# Altium PCB Smart_Plug_PCB.PcbDoc
Units mm, origin at the board's own origin, x right, y up, seen from the top; angles counter-clockwise.
Board outline 228.98 x 84.2 mm, 2 copper layers (Top Layer, Bottom Layer); 70 components, 44 nets, 223 pads, 9 vias.
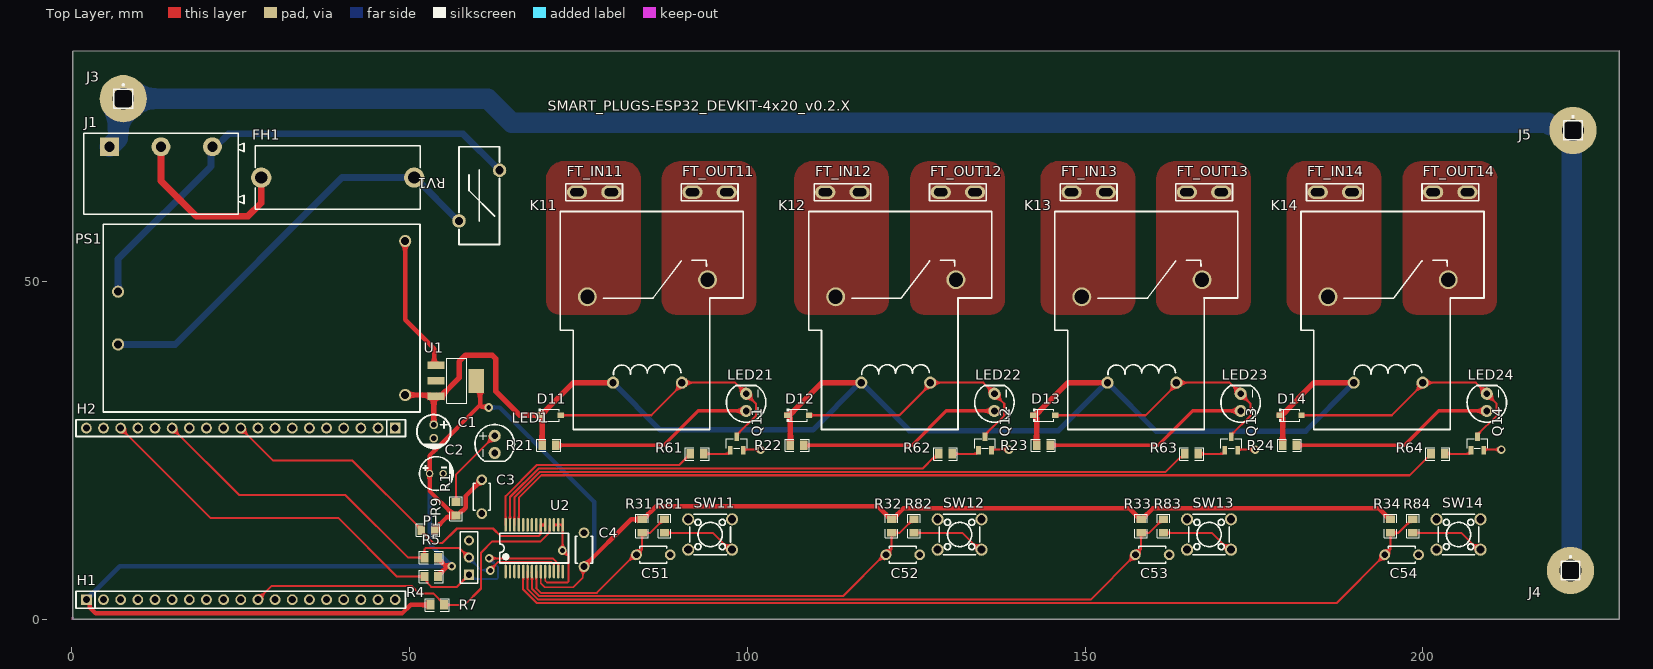
[diagram p0: Top Layer view]
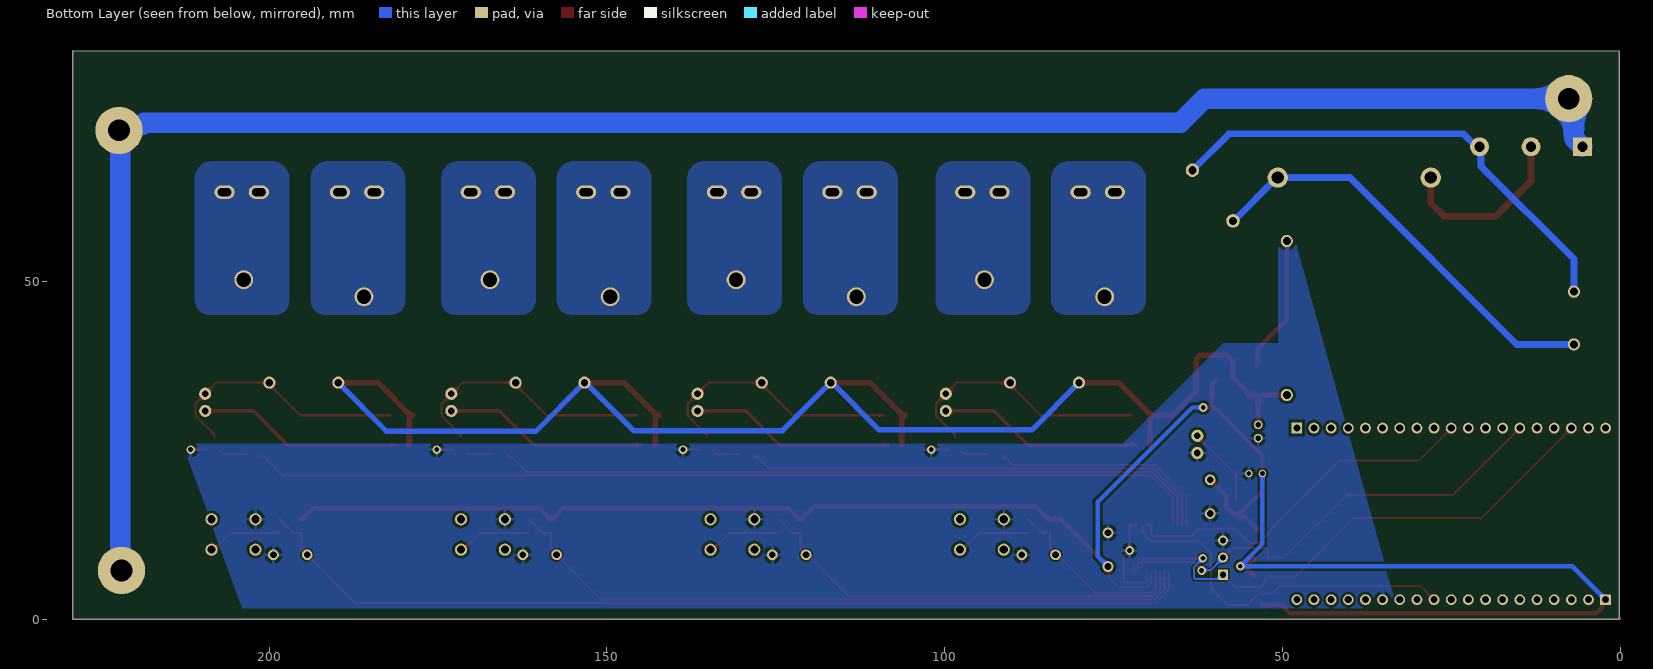
[diagram p1: Bottom Layer view, seen from below]

## Layer stack, top to bottom
Top Solder: solder mask 0.0102, Solder Resist, Dk 3.5
Top Layer: signal copper 0.0356
Dielectric 1: dielectric 0.32, FR-4, Dk 4.8
Bottom Layer: signal copper 0.0356
Bottom Solder: solder mask 0.0102, Solder Resist, Dk 3.5

## Board outline
0.127,0 0.127,84.074 229.108,84.201 229.108,0.127 229.108,0
cut-out: 0,0 0.254,0 0.254,0.254 0,0.254
cut-out: 0,0 0.254,0 0.254,0.254 0,0.254
cut-out: 0,0 0.254,0 0.254,0.254 0,0.254

## Design rules (kind name [scope] priority, off if disabled: settings)
BoardOutlineClearance BoardOutlineClearance_HV [InNetClass('HV_NETS')] p1: gap=3 ignorepadtopadclearanceinfootprint=FALSE
BoardOutlineClearance BoardOutlineClearance_HV_PE [InNetClass('PE_NETS')] p2: gap=0.5 ignorepadtopadclearanceinfootprint=FALSE
Clearance Clearance_HV_Internal [InNetClass('HV_Nets') Or InNetClass('HV_NETS_0.3A') Or InNetClass('PE_NETS') vs InNetClass('HV_Nets') Or InNetClass('HV_NETS_0.3A') Or InNetClass('PE_NETS')] p1: gap=3 ignorepadtopadclearanceinfootprint=FALSE
Clearance Clearance_HV_Isolation [InNetClass('HV_Nets') Or InNetClass('HV_NETS_0.3A') Or InNetClass('PE_NETS') vs InNetClass('LV_Nets')] p2: gap=6 ignorepadtopadclearanceinfootprint=FALSE
Clearance Clearance_SSOP [InComponent('U2')] p3: gap=0.18 ignorepadtopadclearanceinfootprint=FALSE
Clearance Clearance_Exception [InNet('NetU2_*') Or InNet('NetJ2_*') Or InNet('IN_SIG*') Or InNet('DRV_SIG*') Or InNet('NetH*')] p4: gap=0.2 ignorepadtopadclearanceinfootprint=FALSE
Clearance [All] p5: gap=0.4 ignorepadtopadclearanceinfootprint=FALSE
HoleSize [All] p1: absolutevalues=TRUE maxlimit=6 minlimit=0.025 maxpercent=80.000 minpercent=20.000
MinimumSolderMaskSliver Silver_Transistors [HasFootprint('TO-92-3_L4.9-W3.7-P1.27-L') Or InComponent('U2')] p1: minsoldermaskwidth=0.08
MinimumSolderMaskSliver MinimumSolderMaskSliver_1 [All] p2: minsoldermaskwidth=0.254
PolygonConnect Connect_HV_Solid [InNetClass('HV_NETS')] p1: connectstyle=Direct reliefconductorwidth=3 reliefentries=4 polygonreliefangle="90 Angle" airgapwidth=0.254
PolygonConnect [All] p2: connectstyle=Relief reliefconductorwidth=0.5 reliefentries=4 polygonreliefangle="90 Angle" airgapwidth=0.5
RoomDefinition U_Button_Input_Block4 [InComponentClass('U_Button_Input_Block4')] p1: confinementstyle=ConfineIn formatcopy=TRUE lockcomponents=FALSE outline 0,0 50.8,0 50.8,25.4 0,25.4
RoomDefinition U_Button_Input_Block3 [InComponentClass('U_Button_Input_Block3')] p2: confinementstyle=ConfineIn formatcopy=TRUE lockcomponents=FALSE outline 0,0 50.8,0 50.8,25.4 0,25.4
RoomDefinition U_Button_Input_Block2 [InComponentClass('U_Button_Input_Block2')] p3: confinementstyle=ConfineIn formatcopy=TRUE lockcomponents=FALSE outline 0,0 50.8,0 50.8,25.4 0,25.4
RoomDefinition U_Button_Input_Block1 [InComponentClass('U_Button_Input_Block1')] p4: confinementstyle=ConfineIn formatcopy=TRUE lockcomponents=FALSE outline 0,0 50.8,0 50.8,25.4 0,25.4
RoomDefinition U_System_Controller [InComponentClass('U_System_Controller')] p5: confinementstyle=ConfineIn formatcopy=TRUE lockcomponents=FALSE outline 0,0 50.8,0 50.8,25.4 0,25.4
RoomDefinition U_Reset_Block [InComponentClass('U_Reset_Block')] p6: confinementstyle=ConfineIn formatcopy=TRUE lockcomponents=FALSE outline 56.769,0.381 56.769,3.81 51.562,3.81 51.562,0.381
RoomDefinition U_IO_Expander_Interrupt_Block [InComponentClass('U_IO_Expander_Interrupt_Block')] p7: confinementstyle=ConfineIn formatcopy=TRUE lockcomponents=FALSE outline 50.689,12.215 54.753,12.215 54.753,16.787 50.689,16.787
RoomDefinition U_Earth_Connectors [InComponentClass('U_Earth_Connectors')] p8: confinementstyle=ConfineIn formatcopy=TRUE lockcomponents=FALSE outline 33.401,130.937 88.011,130.937 88.011,145.034 33.401,145.034
RoomDefinition Relay_Channel1 [InComponentClass('Relay_Channel1')] p9: confinementstyle=ConfineIn formatcopy=TRUE lockcomponents=FALSE outline 68.453,23.495 102.926,23.495 102.926,68.151 68.453,68.151
RoomDefinition Relay_Channel2 [InComponentClass('Relay_Channel2')] p10: confinementstyle=ConfineIn formatcopy=TRUE lockcomponents=FALSE outline 105.209,23.495 139.682,23.495 139.682,68.151 105.209,68.151
RoomDefinition U_IO_Expander [InComponentClass('U_IO_Expander')] p11: confinementstyle=ConfineIn formatcopy=TRUE lockcomponents=FALSE outline 60.462,5.379 77.47,5.379 77.47,16.808 60.462,16.808
RoomDefinition U_PSU [InComponentClass('U_PSU')] p12: confinementstyle=ConfineIn formatcopy=TRUE lockcomponents=FALSE outline 0,30.223 62.484,30.223 62.484,73.406 0,73.406
RoomDefinition Relay_Channel4 [InComponentClass('Relay_Channel4')] p13: confinementstyle=ConfineIn formatcopy=TRUE lockcomponents=FALSE outline 178.103,23.495 212.575,23.495 212.575,68.151 178.103,68.151
RoomDefinition Relay_Channel3 [InComponentClass('Relay_Channel3')] p14: confinementstyle=ConfineIn formatcopy=TRUE lockcomponents=FALSE outline 141.656,23.495 176.129,23.495 176.129,68.151 141.656,68.151
RoomDefinition U_I2C [InComponentClass('U_I2C')] p15: confinementstyle=ConfineIn formatcopy=TRUE lockcomponents=FALSE outline 60.325,4.654 60.325,13.335 50.695,13.335 50.695,4.654
RoutingVias [All] p1: holewidth=0.711 width=1.27 viastyle="Through Hole" minholewidth=0.711 minwidth=1.27 maxholewidth=0.711 maxwidth=1.27
SilkToSilkClearance [All] p1: silktosilkclearance=0
SilkToSolderMaskClearance [IsPad] p1: minsilkscreentomaskgap=0 clearancetoexposedcopper=TRUE
SolderMaskExpansion [All] p1: expansion=0.102 istentingtop=FALSE
Width Width_PE [InNetClass('PE_NETS')] p1: maxlimit=3 minlimit=3 preferedwidth=3
Width Width_HV_20A [InNetClass('HV_Nets')] p2: maxlimit=50 minlimit=4 preferedwidth=6
Width Width_HV_0.3A [InNetClass('HV_NETS_0.3A')] p3: maxlimit=1 minlimit=1 preferedwidth=1
Width Width_DC_MAIN_5V [InNetClass('DC_MAIN_5V')] p4: maxlimit=1 minlimit=0.8 preferedwidth=0.8
Width Width_DC_MAIN_3V3 [InNetClass('DC_MAIN_3V3')] p5: maxlimit=1 minlimit=0.2 preferedwidth=0.65
Width Width_LV [All] p6: maxlimit=1 minlimit=0.25 preferedwidth=0.305
26 further rules are at their usual default settings.

## Classes and differential pairs
component class U_IO_Expander_Interrupt_Block: R9
net class DC_MAIN_5V: +5V
net class DC_MAIN_3V3: +3V3
net class HV_NETS_0.3A: NetFH1_1 NetFH1_2 NetJ1_3
component class U_Reset_Block: R7
net class PE_NETS: AC_PE
component class U_Earth_Connectors: J3 J4 J5
net class LV_NETS: +3V3 +5V DRV_SIG1 DRV_SIG2 DRV_SIG3 DRV_SIG4 GND IN_SIG1 IN_SIG2 IN_SIG3 IN_SIG4 NetH1_11 NetH2_14 NetH2_17
net class HV_NETS: NetFT_IN11_1 NetFT_IN12_1 NetFT_IN13_1 NetFT_IN14_1 NetFT_OUT11_1 NetFT_OUT12_1 NetFT_OUT13_1 NetFT_OUT14_1
channel class Relay_Channel: Relay_Channel1 Relay_Channel2 Relay_Channel3 Relay_Channel4
channel class Button_Input_Block: U_Button_Input_Block1 U_Button_Input_Block2 U_Button_Input_Block3 U_Button_Input_Block4
net class DRV_SIG[1..4]: DRV_SIG1 DRV_SIG2 DRV_SIG3 DRV_SIG4
component class U_PSU: C1 C2 C3 FH1 J1 LED1 PS1 R1 RV1 U1
component class U_System_Controller: H1 H2
component class U_IO_Expander: C4 U2
component class U_I2C: P1 R4 R5
component class Relay_Channel4: D14 FT_IN14 FT_OUT14 K14 LED24 Q14 R24 R64
component class Relay_Channel3: D13 FT_IN13 FT_OUT13 K13 LED23 Q13 R23 R63
component class Relay_Channel2: D12 FT_IN12 FT_OUT12 K12 LED22 Q12 R22 R62
component class Relay_Channel1: D11 FT_IN11 FT_OUT11 K11 LED21 Q11 R21 R61
component class U_Button_Input_Block4: C54 R34 R84 SW14
component class U_Button_Input_Block3: C53 R33 R83 SW13
component class U_Button_Input_Block2: C52 R32 R82 SW12
component class U_Button_Input_Block1: C51 R31 R81 SW11

## Components (designator, comment, footprint, x,y, rotation, side; value= is the part's Value field where it differs from the comment)
C1 "10uF" CAP-TH_BD5.0-P2.00-D0.8-FD 53.594,27.813 r270 top
C2 "22uF" CAP-TH_BD5.0-P2.00-D0.5-FD-1 53.975,21.59 r0 top
C3 "100nF" CAP-TH_L4.0-W2.5-P5.00-D1.0 60.706,18.161 r270 top
C4 "100nF" CAP-TH_L4.0-W2.5-P5.00-D1.0 75.829,10.319 r270 top
C51 "100nF" CAP-TH_L4.0-W2.5-P5.00-D1.0 86.096,9.557 r180 top (schematic designator C5)
C52 "100nF" CAP-TH_L4.0-W2.5-P5.00-D1.0 123.026,9.557 r180 top (schematic designator C5)
C53 "100nF" CAP-TH_L4.0-W2.5-P5.00-D1.0 159.957,9.557 r180 top (schematic designator C5)
C54 "100nF" CAP-TH_L4.0-W2.5-P5.00-D1.0 196.887,9.557 r180 top (schematic designator C5)
D11 "1N4148W" SOD-123_L3.1-W1.7-LS3.7-RD 70.755,30.226 r0 top (schematic designator D1)
D12 "1N4148W" SOD-123_L3.1-W1.7-LS3.7-RD 107.511,30.226 r0 top (schematic designator D1)
D13 "1N4148W" SOD-123_L3.1-W1.7-LS3.7-RD 143.958,30.226 r0 top (schematic designator D1)
D14 "1N4148W" SOD-123_L3.1-W1.7-LS3.7-RD 180.405,30.226 r0 top (schematic designator D1)
FH1 "PTF-77" FUSE-TH_L24.4-W9.4-P22.60 39.37,65.405 r0 top
FT_IN11 "EST026" CONN-TH_L6.3-W0.8-EST026 77.34,63.246 r180 top (schematic designator FT_IN1)
FT_IN12 "EST026" CONN-TH_L6.3-W0.8-EST026 114.097,63.246 r180 top (schematic designator FT_IN1)
FT_IN13 "EST026" CONN-TH_L6.3-W0.8-EST026 150.543,63.246 r180 top (schematic designator FT_IN1)
FT_IN14 "EST026" CONN-TH_L6.3-W0.8-EST026 186.99,63.246 r180 top (schematic designator FT_IN1)
FT_OUT11 "EST026" CONN-TH_L6.3-W0.8-EST026 94.428,63.246 r180 top (schematic designator FT_OUT1)
FT_OUT12 "EST026" CONN-TH_L6.3-W0.8-EST026 131.185,63.246 r180 top (schematic designator FT_OUT1)
FT_OUT13 "EST026" CONN-TH_L6.3-W0.8-EST026 167.631,63.246 r180 top (schematic designator FT_OUT1)
FT_OUT14 "EST026" CONN-TH_L6.3-W0.8-EST026 204.078,63.246 r180 top (schematic designator FT_OUT1)
H1 "2.54-1*19P母" HDR-TH_19P-P2.54-V-F 25.019,2.921 r0 top
H2 "2.54-1*19P母" HDR-TH_19P-P2.54-V-F 25.019,28.321 r180 top
J1 "KF7.62-3P" CONN-TH_KF7.62-3P 13.208,69.977 r0 top
J3 "Socket" PIN1 7.62,77.089 r0 top
J4 "Socket" PIN1 221.869,7.239 r0 top
J5 "Socket" PIN1 222.25,72.39 r0 top
K11 "HF105F-1/005D-1HST" HF105F-1_005D-1HST1_Update 85.227,42.672 r0 top (schematic designator K1)
K12 "HF105F-1/005D-1HST" HF105F-1_005D-1HST1_Update 121.983,42.672 r0 top (schematic designator K1)
K13 "HF105F-1/005D-1HST" HF105F-1_005D-1HST1_Update 158.43,42.672 r0 top (schematic designator K1)
K14 "HF105F-1/005D-1HST" HF105F-1_005D-1HST1_Update 194.877,42.672 r0 top (schematic designator K1)
LED1 "333-2SURD/S530-A3" LED-TH_BD5.9-P2.54-RD_RED 62.611,25.908 r90 top
LED21 "333-2SURD/S530-A3" LED-TH_BD5.9-P2.54-RD_RED 99.838,32.131 r270 top (schematic designator LED2)
LED22 "333-2SURD/S530-A3" LED-TH_BD5.9-P2.54-RD_RED 136.594,32.131 r270 top (schematic designator LED2)
LED23 "333-2SURD/S530-A3" LED-TH_BD5.9-P2.54-RD_RED 173.041,32.131 r270 top (schematic designator LED2)
LED24 "333-2SURD/S530-A3" LED-TH_BD5.9-P2.54-RD_RED 209.488,32.131 r270 top (schematic designator LED2)
P1 "2.54-1*3PPin" HDR1X3 58.801,6.604 r90 top
PS1 "HLK-10M05" PWRM-TH_HLK-10M05 28.108,44.614 r0 top
Q11 "SS8050(RANGE:200-350)" SOT-23-3_L2.9-W1.3-P1.90-LS2.4-BR 98.441,26.035 r270 top (schematic designator Q1)
Q12 "SS8050(RANGE:200-350)" SOT-23-3_L2.9-W1.3-P1.90-LS2.4-BR 135.197,26.035 r270 top (schematic designator Q1)
Q13 "SS8050(RANGE:200-350)" SOT-23-3_L2.9-W1.3-P1.90-LS2.4-BR 171.644,26.035 r270 top (schematic designator Q1)
Q14 "SS8050(RANGE:200-350)" SOT-23-3_L2.9-W1.3-P1.90-LS2.4-BR 208.091,26.035 r270 top (schematic designator Q1)
R1 "1kΩ" R0805 56.896,16.383 r270 top
R4 "4.7kΩ" R0805 53.213,6.35 r0 top
R5 "4.7kΩ" R0805 53.213,9.144 r0 top
R7 "10kΩ" R0805 54.102,2.159 r180 top
R9 "10kΩ" R0805 52.721,13.208 r0 top
R21 "470Ω" R0805 70.628,25.781 r180 top (schematic designator R2)
R22 "470Ω" R0805 107.384,25.781 r180 top (schematic designator R2)
R23 "470Ω" R0805 143.831,25.781 r180 top (schematic designator R2)
R24 "470Ω" R0805 180.278,25.781 r180 top (schematic designator R2)
R31 "10kΩ" R0805 84.445,13.819 r90 top (schematic designator R3)
R32 "10kΩ" R0805 121.375,13.819 r90 top (schematic designator R3)
R33 "10kΩ" R0805 158.306,13.819 r90 top (schematic designator R3)
R34 "10kΩ" R0805 195.236,13.819 r90 top (schematic designator R3)
R61 "1kΩ" R0805 92.583,24.511 r0 top (schematic designator R6)
R62 "1kΩ" R0805 129.339,24.511 r0 top (schematic designator R6)
R63 "1kΩ" R0805 165.786,24.511 r0 top (schematic designator R6)
R64 "1kΩ" R0805 202.233,24.511 r0 top (schematic designator R6)
R81 "1kΩ" R0805 87.747,13.819 r90 top (schematic designator R8)
R82 "1kΩ" R0805 124.677,13.819 r90 top (schematic designator R8)
R83 "1kΩ" R0805 161.608,13.819 r90 top (schematic designator R8)
R84 "1kΩ" R0805 198.538,13.819 r90 top (schematic designator R8)
RV1 "440pF" RES-TH_L14.5-W6.0-P7.50-D0.8-S6.0 60.325,62.738 r270 top
SW11 "TS-1002-07026" SW-TH_4P-L6.0-W6.0-P4.50-LS6.5 94.507,12.569 r180 top (schematic designator SW1)
SW12 "TS-1002-07026" SW-TH_4P-L6.0-W6.0-P4.50-LS6.5 131.437,12.569 r180 top (schematic designator SW1)
SW13 "TS-1002-07026" SW-TH_4P-L6.0-W6.0-P4.50-LS6.5 168.367,12.569 r180 top (schematic designator SW1)
SW14 "TS-1002-07026" SW-TH_4P-L6.0-W6.0-P4.50-LS6.5 205.298,12.569 r180 top (schematic designator SW1)
U1 "AMS1117-3.3" SOT-223-3_L6.5-W3.4-P2.30-LS7.0-BR 56.896,35.306 r180 top
U2 "MCP23017-E/SS" SSOP-28_L10.2-W5.3-P0.65-LS7.8-BL 68.453,10.541 r0 top

## Footprints (in the part's own frame and the unit in brackets; to place one, negate y for a bottom-side part, rotate by r counter-clockwise, add the part's x,y. Pads: shape width x height; smd on the part's side, far side on the other; paste and mask are expansions set on the pad)
CAP-TH_BD5.0-P2.00-D0.5-FD-1 [mm]
  round 1.1 hole 0.7 paste+0 mask+0.05: 1(-1,0) 2(1,0)
  silkscreen extent -2.5,-2.5 2.54,2.5
CAP-TH_BD5.0-P2.00-D0.8-FD [mm]
  round 1.3 hole 0.8: 1(-1,0) 2(1,0)
  silkscreen extent -2.5,-2.5 2.5,2.5
CAP-TH_L4.0-W2.5-P5.00-D1.0 [mm]
  round 1.6 hole 1: 1(-2.5,0) 2(2.5,0)
  silkscreen extent -2,-1.27 2,1.25
CONN-TH_KF7.62-3P [mm]
  rect 2.8x2.8 hole 1.5: 1(-7.62,0)
  round 2.8 hole 1.5: 2(0,0) 3(7.62,0)
  silkscreen extent -11.45,-10 12.3,2
CONN-TH_L6.3-W0.8-EST026 [mm]
  oval 3x2 hole 1.2 slot 2 at 0 deg: 1(-2.54,0) 2(2.54,0)
  silkscreen extent -4.2,-1.25 4.2,1.25
FUSE-TH_L24.4-W9.4-P22.60 [mm]
  round 3 hole 1.8: 1(-11.325,0) 2(11.325,0)
  silkscreen extent -12.2,-4.7 12.2,4.7
HDR1X3 [mm] "Connector; Header; 3 Position"
  rect 1.5x1.5 hole 0.9: 1(0,0)
  round 1.5 hole 0.9: 2(2.54,0) 3(5.08,0)
  silkscreen extent -1.27,-1.27 6.35,1.27
HDR-TH_19P-P2.54-V-F [mm]
  rect 1.6x1.6 hole 1.05: 1(-22.86,0)
  round 1.6 hole 1.05: 2(-20.32,0) 3(-17.78,0) 4(-15.24,0) 5(-12.7,0) 6(-10.16,0) 7(-7.62,0) 8(-5.08,0) 9(-2.54,0) 10(0,0) 11(2.54,0) 12(5.08,0) 13(7.62,0) 14(10.16,0) 15(12.7,0) 16(15.24,0) 17(17.78,0) 18(20.32,0) 19(22.86,0)
  silkscreen extent -24.38,-1.25 24.38,1.25
HF105F-1_005D-1HST1_Update [mm]
  round 1.8 hole 1.1: 1(-5.1,-7.62) 2(5.1,-7.62)
  round 2.8 hole 2.1: 3(-8.9,5.08) 4(8.9,7.62)
  silkscreen extent -12.9,-14.58 14.2,17.72
LED-TH_BD5.9-P2.54-RD_RED [mm]
  round 1.8 hole 1 paste+0 mask+0.05: 1(-1.27,0) 2(1.27,0)
  silkscreen extent -2.49,-2.92 2.94,2.92
PIN1 [mm] "Connector; Plug"
  round 7 hole 3.2: 1(0,0)
  silkscreen extent -1.4,-1.4 1.4,2.17
PWRM-TH_HLK-10M05 [mm]
  round 1.8 hole 1.2: 1(-21.25,3.9) 2(-21.25,-3.9) 3(21.25,11.4) 4(21.25,-11.4)
  silkscreen extent -23.45,-13.9 23.45,13.9
R0805 [mm]
  rect 1.133x1.377 smd paste-100 mask+0.051: 1(-1,0) 2(1,0)
  silkscreen extent -1.76,-0.92 1.76,0.92
RES-TH_L14.5-W6.0-P7.50-D0.8-S6.0 [mm]
  round 2 hole 1.2: 1(-3.75,3) 2(3.75,-3)
  silkscreen extent -7.25,-3 7.25,3
SOD-123_L3.1-W1.7-LS3.7-RD [mm]
  rect 0.91x0.84 smd: 1(-1.63,0) 2(1.63,0)
  silkscreen extent -1.63,-0.98 1.4,0.98
SOT-23-3_L2.9-W1.3-P1.90-LS2.4-BR [mm]
  rect 1.25x0.7 smd: 1(1,-0.95) 2(1,0.95) 3(-1,0)
  silkscreen extent -0.73,-1.53 0.73,1.53
SOT-223-3_L6.5-W3.4-P2.30-LS7.0-BR [mm]
  rect 2.5x1.1 smd: 1(2.97,-2.3) 2(2.97,0) 3(2.97,2.3)
  rect 2.34x3.6 smd: 4(-2.97,0)
  silkscreen extent -1.57,-3.33 1.37,3.33
SSOP-28_L10.2-W5.3-P0.65-LS7.8-BL [mm]
  oval 0.364x2.015 smd: 1(-4.225,-3.455) 2(-3.575,-3.455) 3(-2.925,-3.455) 4(-2.275,-3.455) 5(-1.625,-3.455) 6(-0.975,-3.455) 7(-0.325,-3.455) 8(0.325,-3.455) 9(0.975,-3.455) 10(1.625,-3.455) 11(2.275,-3.455) 12(2.925,-3.455) 13(3.575,-3.455) 14(4.225,-3.455) 15(4.225,3.455) 16(3.575,3.455) 17(2.925,3.455) 18(2.275,3.455) 19(1.625,3.455) 20(0.975,3.455) 21(0.325,3.455) 22(-0.325,3.455) 23(-0.975,3.455) 24(-1.625,3.455) 25(-2.275,3.455) 26(-2.925,3.455) 27(-3.575,3.455) 28(-4.225,3.455)
  silkscreen extent -5.08,-2.2 5.08,2.2
SW-TH_4P-L6.0-W6.0-P4.50-LS6.5 [mm]
  round 1.8 hole 1.2: 1(-3.25,2.25) 2(3.25,2.25) 3(-3.25,-2.25) 4(3.25,-2.25)
  silkscreen extent -3,-3 3,3

## Part data
C1: library part 50YXJ10M5X11
C2: library part 50YXJ22M5X11
C3 C4 C51 C52 C53 C54: library part FG28X7R1H104KNT06
D11 D12 D13 D14: library part 1N4148W_C727110
P1: library part "Header 3", "-40℃~+105℃ 1 1x3P 2.54mm 2.5mm 3A 3P 3mm 6mm Black Brass Gold Pin Header Through Hole Plugin,P=2.54mm Pin Headers ROHS"
Q11 Q12 Q13 Q14: library part SS8050(RANGE:200-350)_C2150
R1 R61 R62 R63 R64 R81 R82 R83 R84: library part 0805W8F1001T5E
R4 R5: library part 0805W8F4701T5E
R7 R9 R31 R32 R33 R34: library part 0805W8F1002T5E
R21 R22 R23 R24: library part 0805W8F4700T5E
RV1: library part 14D431K_C49069732
U1: library part AMS1117-3.3_C6186

## Via types
v1: diameter 1.27, hole 0.711, Top Layer to Bottom Layer, 9 vias

## Nets (pads, with @x,y where several pads share a name; then routed paths per layer and width w, separated by ;. In a path a pad name is that pad's centre, name@x,y a point inside that pad or via, vN(x,y) a via of type N, cw(c..) or ccw(c..) an arc to the next point about the centre after c; other vN are vias at no path point)
+3V3: C2.1 C3.1 C4.2 H1.1 R1.2 R4.2 R5.2 R7.2 R9.2 R31.2 R32.2 R33.2 R34.2 U1.4 U2.9 | length 335.5
  Top Layer w0.2: U2.9@69.399,6.919 69.424,6.894 69.424,5.384 70.047,4.761 74.23,4.761 75.665,6.196 75.665,7.655 C4.2
  Top Layer w0.65: H1.1 2.634,2.446 2.634,1.811 3.556,0.889 48.895,0.889 50.165,2.159 R7.2 ; R9.2 53.721,13.33 55.532,15.142 56.655,15.142 R1.2 ; R4.2 54.213,6.472 55.496,7.755 56.142,7.755 v1(56.261,7.874) 56.142,7.993 55.242,7.993 54.213,9.022 R5.2 ; U1.4 60.452,34.72 60.452,31.726 ; C3.1 58.31,18.264 58.31,16.516 57.877,16.084 57.719,16.084 57.018,15.383 R1.2 ; v1(61.722,31.369) 61.603,31.488 60.691,31.488 60.452,31.726 ; C4.2 82.829,14.819 R31.2 84.567,14.819 86.512,16.764 119.308,16.764 121.253,14.819 R32.2 121.498,14.819 123.122,16.444 156.558,16.444 158.183,14.819 R33.2 158.428,14.819 160.053,16.444 193.489,16.444 195.114,14.819 R34.2 ; R1.2 56.655,15.624 56.375,15.624 52.975,19.024 C2.1 52.975,24.249 53.857,25.131 60.452,31.726
  Bottom Layer w0.65: H1.1 7.112,7.874 v1(56.261,7.874) 52.975,11.16 C2.1 ; v1(61.722,31.369) 63.373,31.369 77.354,17.388 77.354,9.344 C4.2
+5V: C1.1 D11.1 D12.1 D13.1 D14.1 K11.1 K12.1 K13.1 K14.1 PS1.4 R21.2 R22.2 R23.2 R24.2 U1.3 | length 233.5
  Top Layer w0.8: PS1.4 53.018,33.214 53.226,33.006 U1.3@53.744,33.006 ; C1.1 53.594,32.856 U1.3@53.744,33.006 ; D11.1@69.16,30.226 69.628,29.758 R21.2 ; K11.1@80.397,35.039 74.282,35.039 69.489,30.246 69.145,30.246 D11.1 66.294,30.226 62.738,33.782 62.738,38.608 62.23,39.116 58.293,39.116 57.36,38.183 57.36,35.74 54.626,33.006 U1.3 U1.3@53.744,33.006 ; D12.1 105.901,30.246 106.245,30.246 111.038,35.039 K12.1@117.153,35.039 ; D12.1@105.916,30.226 106.384,29.758 R22.2 ; D13.1 142.348,30.246 142.692,30.246 147.485,35.039 K13.1@153.6,35.039 ; D13.1@142.363,30.226 142.831,29.758 R23.2 ; D14.1 178.795,30.246 179.139,30.246 183.931,35.039 K14.1@190.047,35.039 ; D14.1@178.81,30.226 179.278,29.758 R24.2
  Bottom Layer w0.8: K11.1 87.112,28.067 109.728,28.067 116.713,35.052 K12.1 123.995,27.94 146.05,27.94 153.162,35.052 K13.1 160.528,27.854 182.667,27.854 189.777,34.964 K14.1
AC_PE: J1.1 J3.1 J4.1 J5.1 | length 289.8
  Bottom Layer w3: J1.1 6.855,71.244 6.855,76.324 J3.1 61.595,77.089 65.151,73.533 218.493,73.533 218.87,73.155 221.485,73.155 J5.1 222.059,72.2 222.059,7.429 J4.1
DRV_SIG1: R61.1 U2.28 | length 34.3
  Top Layer w0.305: U2.28 64.228,18.237 68.842,22.85 89.922,22.85 91.047,23.975 91.169,23.975 91.583,24.389 R61.1
DRV_SIG2: R62.1 U2.27 | length 70.2
  Top Layer w0.305: U2.27 64.878,18.116 69.108,22.346 125.986,22.346 127.71,24.069 ; R62.1@127.803,23.975 127.926,23.975 128.339,24.389 R62.1
DRV_SIG3: R63.1 U2.26 | length 106
  Top Layer w0.305: U2.26 65.528,18.049 69.32,21.841 161.928,21.841 164.156,24.069 ; R63.1@164.25,23.975 164.372,23.975 164.786,24.389 R63.1
DRV_SIG4: R64.1 U2.25 | length 142.6
  Top Layer w0.305: U2.25 66.178,17.985 69.529,21.336 198.058,21.336 R64.1 201.233,24.389 200.819,23.975 R64.1@200.697,23.975
GND: C1.2 C2.2 C3.2 C4.1 C51.1 C52.1 C53.1 C54.1 H1.14 LED1.1 P1.3 PS1.3 Q11.2 Q12.2 Q13.2 Q14.2 SW11.4 SW12.4 SW13.4 SW14.4 U1.1 U2.10 U2.15 U2.16 U2.17 | length 46
  Top Layer w0.25: U2.10 70.1,7.064 70.1,5.719 70.358,5.461 73.387,5.461 73.533,5.607 73.533,9.312 v1(72.641,10.204) 72.66,10.223 72.66,13.978 U2.15 U2.16 U2.17 ; Q11.2 99.502,25.146 v1(101.997,25.146) ; Q12.2 136.258,25.146 v1(138.753,25.146) ; Q13.2 172.705,25.146 v1(175.2,25.146) ; Q14.2 209.152,25.146 v1(211.647,25.146)
  Top Layer w0.65: PS1.3 49.358,44.368 53.662,40.064 53.662,37.831 53.887,37.606 U1.1
IN_SIG1: C51.2 R31.1 R81.2 U2.8 | length 27.7
  Top Layer w0.305: U2.8 68.778,4.652 68.757,4.631 69.452,3.937 77.724,3.937 83.344,9.557 C51.2 83.596,9.637 84.445,10.486 R31.1 85.625,12.819 87.625,14.819 R81.2
IN_SIG2: C52.2 R32.1 R82.2 U2.7 | length 65.7
  Top Layer w0.305: U2.7@68.099,6.919 U2.7@68.122,6.896 ; U2.7 68.128,4.547 69.243,3.432 114.176,3.432 120.301,9.557 C52.2 120.526,9.637 121.375,10.486 R32.1 122.555,12.819 124.555,14.819 R82.2
IN_SIG3: C53.2 R33.1 R83.2 U2.6 | length 103.7
  Top Layer w0.305: U2.6 67.478,4.483 69.033,2.927 150.827,2.927 C53.2 157.457,9.637 158.306,10.486 R33.1 159.485,12.819 161.485,14.819 R83.2
IN_SIG4: C54.2 R34.1 R84.2 U2.5 | length 141.8
  Top Layer w0.305: U2.5 66.828,4.419 68.824,2.423 187.253,2.423 C54.2 194.387,9.637 195.236,10.486 R34.1 196.416,12.819 198.416,14.819 R84.2
NetD11_2: D11.2 K11.2 LED21.1 Q11.3 | length 38.3
  Top Layer w0.305: D11.2 85.784,30.226 90.597,35.039 98.2,35.039 LED21.1 101.29,31.949 101.29,30.159 98.441,27.31 Q11.3
NetD12_2: D12.2 K12.2 LED22.1 Q12.3 | length 38.3
  Top Layer w0.305: D12.2 122.54,30.226 127.353,35.039 134.957,35.039 LED22.1 138.047,31.949 138.047,30.159 135.197,27.31 Q12.3
NetD13_2: D13.2 K13.2 LED23.1 Q13.3 | length 38.3
  Top Layer w0.305: D13.2 158.987,30.226 163.8,35.039 171.403,35.039 LED23.1 174.493,31.949 174.493,30.159 171.644,27.31 Q13.3
NetD14_2: D14.2 K14.2 LED24.1 Q14.3 | length 38.3
  Top Layer w0.305: D14.2 195.434,30.226 200.246,35.039 207.85,35.039 LED24.1 210.94,31.949 210.94,30.159 208.091,27.31 Q14.3
NetFH1_1: FH1.1 J1.2 | length 26.6
  Top Layer w1: J1.2 13.208,64.897 18.415,59.69 26.084,59.69 28.045,61.651 FH1.1
NetFH1_2: FH1.2 PS1.2 RV1.2 | length 63.4
  Bottom Layer w1: PS1.2 15.314,40.714 40.005,65.405 FH1.2 50.801,65.405 57.218,58.988 RV1.2
NetFT_IN11_1: FT_IN11.1 FT_IN11.2 K11.3
NetFT_IN12_1: FT_IN12.1 FT_IN12.2 K12.3
NetFT_IN13_1: FT_IN13.1 FT_IN13.2 K13.3
NetFT_IN14_1: FT_IN14.1 FT_IN14.2 K14.3
NetFT_OUT11_1: FT_OUT11.1 FT_OUT11.2 K11.4
NetFT_OUT12_1: FT_OUT12.1 FT_OUT12.2 K12.4
NetFT_OUT13_1: FT_OUT13.1 FT_OUT13.2 K13.4
NetFT_OUT14_1: FT_OUT14.1 FT_OUT14.2 K14.4
NetH1_11: H1.11 R7.1 U2.18 | length 53.7
  Top Layer w0.305: H1.11 29.591,4.953 50.292,4.953 51.435,3.81 53.573,3.81 55.102,2.281 R7.1 58.166,2.159 60.579,4.572 60.579,9.891 62.245,11.557 69.401,11.557 70.699,12.855 U2.18@70.699,13.819
NetH2_10: H2.10 R9.1 U2.19 U2.20 | length 55.1
  Top Layer w0.305: H2.10 29.845,23.495 41.556,23.495 51.721,13.33 R9.1 51.721,13.086 53.504,11.303 54.864,11.303 57.023,13.462 62.357,13.462 63.5,12.319 69.088,12.319 69.417,12.648 69.417,13.985 U2.20 U2.19
NetH2_14: H2.14 P1.2 R5.1 U2.12 | length 68.9
  Top Layer w0.305: H2.14 24.765,18.415 40.513,18.415 49.784,9.144 R5.1 52.213,10.362 52.392,10.541 57.404,10.541 P1.2 ; v1(61.976,7.239) 61.976,7.366 63.119,8.509 70.993,8.509 71.367,8.135 71.367,7.097 U2.12
  Bottom Layer w0.305: P1.2 60.648,7.297 61.918,7.297 v1(61.976,7.239)
NetH2_17: H2.17 P1.1 R4.1 U2.13 | length 82.1
  Top Layer w0.305: H2.17 20.574,14.986 39.497,14.986 48.133,6.35 R4.1 52.597,5.966 52.597,5.442 53.213,4.826 57.023,4.826 P1.1 ; v1(61.788,9.043) 71.221,9.043 72.017,8.247 72.017,7.097 U2.13
  Bottom Layer w0.305: P1.1 59.399,6.006 62.94,6.006 63.119,6.185 63.119,7.712 v1(61.788,9.043)
NetJ1_3: J1.3 PS1.1 RV1.1 | length 72.8
  Bottom Layer w1: PS1.1 6.858,53.34 20.595,67.077 20.595,69.744 J1.3 21.315,69.977 23.22,71.882 57.931,71.882 RV1.1
NetLED1_2: LED1.2 R1.1 | length 12.2
  Top Layer w0.305: R1.1 56.896,21.463 LED1.2
NetLED21_2: LED21.2 R21.1 | length 30.3
  Top Layer w0.508: R21.1 87.646,25.781 92.726,30.861 LED21.2
NetLED22_2: LED22.2 R22.1 | length 30.3
  Top Layer w0.508: R22.1 124.402,25.781 129.482,30.861 LED22.2
NetLED23_2: LED23.2 R23.1 | length 30.3
  Top Layer w0.508: R23.1 160.849,25.781 165.929,30.861 LED23.2
NetLED24_2: LED24.2 R24.1 | length 30.3
  Top Layer w0.508: R24.1 197.296,25.781 202.376,30.861 LED24.2
NetQ11_1: Q11.1 R61.2 | length 4.3
  Top Layer w0.305: R61.2 97.242,24.511 97.491,24.76 Q11.1
NetQ12_1: Q12.1 R62.2 | length 4.3
  Top Layer w0.305: R62.2 133.998,24.511 134.247,24.76 Q12.1
NetQ13_1: Q13.1 R63.2 | length 4.3
  Top Layer w0.305: R63.2 170.445,24.511 170.694,24.76 Q13.1
NetQ14_1: Q14.1 R64.2 | length 4.3
  Top Layer w0.305: R64.2 206.892,24.511 207.141,24.76 Q14.1
NetR81_1: R81.1 SW11.1 | length 11
  Top Layer w0.305: R81.1 94.899,12.819 97.399,10.319 SW11.1
NetR82_1: R82.1 SW12.1 | length 11
  Top Layer w0.305: R82.1 131.829,12.819 134.329,10.319 SW12.1
NetR83_1: R83.1 SW13.1 | length 11
  Top Layer w0.305: R83.1 168.76,12.819 171.26,10.319 SW13.1
NetR84_1: R84.1 SW14.1 | length 11
  Top Layer w0.305: R84.1 205.69,12.819 208.19,10.319 SW14.1
pads on no net: H1.2 H1.3 H1.4 H1.5 H1.6 H1.7 H1.8 H1.9 H1.10 H1.12 H1.13 H1.15 H1.16 H1.17 H1.18 H1.19 H2.1 H2.2 H2.3 H2.4 H2.5 H2.6 H2.7 H2.8 H2.9 H2.11 H2.12 H2.13 H2.15 H2.16 H2.18 H2.19 SW11.2 SW11.3 SW12.2 SW12.3 SW13.2 SW13.3 SW14.2 SW14.3 U1.2 U2.1 U2.2 U2.3 U2.4 U2.11 U2.14 U2.21 U2.22 U2.23 U2.24

## Polygon pours and split planes (outlines as drawn)
NetFT_OUT14_1 on Bottom Layer "NetJ_OUT_Relay_Channel4_1" (solid, pour order 54): 197.026,65.151 197.026,47.244 ccw(c199.185,47.244) 199.185,45.085 208.837,45.085 ccw(c208.837,47.244) 210.996,47.244 210.996,65.151 ccw(c208.424,65.278) 208.551,67.85 199.724,67.85 ccw(c199.724,65.151)
NetFT_IN14_1 on Bottom Layer "NetJ_OUT_Relay_Channel4_1" (solid, pour order 46): 179.881,65.151 179.881,47.244 ccw(c182.04,47.244) 182.04,45.085 191.692,45.085 ccw(c191.692,47.244) 193.851,47.244 193.851,65.151 ccw(c191.279,65.278) 191.406,67.85 182.579,67.85 ccw(c182.579,65.151)
NetFT_OUT13_1 on Bottom Layer "NetJ_OUT_Relay_Channel4_1" (solid, pour order 53): 160.579,65.151 160.579,47.244 ccw(c162.738,47.244) 162.738,45.085 172.39,45.085 ccw(c172.39,47.244) 174.549,47.244 174.549,65.151 ccw(c171.977,65.278) 172.104,67.85 163.278,67.85 ccw(c163.278,65.151)
NetFT_IN13_1 on Bottom Layer "NetJ_OUT_Relay_Channel4_1" (solid, pour order 45): 143.434,65.151 143.434,47.244 ccw(c145.593,47.244) 145.593,45.085 155.245,45.085 ccw(c155.245,47.244) 157.404,47.244 157.404,65.151 ccw(c154.832,65.278) 154.959,67.85 146.133,67.85 ccw(c146.133,65.151)
NetFT_OUT12_1 on Bottom Layer "NetJ_OUT_Relay_Channel4_1" (solid, pour order 52): 124.132,65.151 124.132,47.244 ccw(c126.291,47.244) 126.291,45.085 135.943,45.085 ccw(c135.943,47.244) 138.102,47.244 138.102,65.151 ccw(c135.531,65.278) 135.658,67.85 126.831,67.85 ccw(c126.831,65.151)
NetFT_IN12_1 on Bottom Layer "NetJ_OUT_Relay_Channel4_1" (solid, pour order 44): 106.987,65.151 106.987,47.244 ccw(c109.146,47.244) 109.146,45.085 118.798,45.085 ccw(c118.798,47.244) 120.957,47.244 120.957,65.151 ccw(c118.386,65.278) 118.513,67.85 109.686,67.85 ccw(c109.686,65.151)
GND on Bottom Layer "NetJ_OUT_Relay_Channel4_1" (solid, remove dead copper, pour order 42): 48.282,56.769 49.53,56.769 cw(c49.53,55.7) 50.6,55.699 50.6,40.894 58.801,40.894 73.66,26.035 212.85,26.035 203.967,1.651 34.072,1.651 33.354,2.594
NetFT_IN11_1 on Bottom Layer "NetJ_OUT_Relay_Channel4_1" (solid, pour order 43): 70.231,65.151 70.231,47.244 ccw(c72.39,47.244) 72.39,45.085 82.042,45.085 ccw(c82.042,47.244) 84.201,47.244 84.201,65.151 ccw(c81.629,65.278) 81.756,67.85 72.93,67.85 ccw(c72.93,65.151)
NetFT_OUT11_1 on Bottom Layer "NetJ_OUT_Relay_Channel4_1" (solid, pour order 51): 87.376,65.151 87.376,47.244 ccw(c89.535,47.244) 89.535,45.085 99.187,45.085 ccw(c99.187,47.244) 101.346,47.244 101.346,65.151 ccw(c98.774,65.278) 98.901,67.85 90.075,67.85 ccw(c90.075,65.151)
NetFT_OUT12_1 on Top Layer "NetJ_OUT_Relay_Channel4_1" (solid, pour order 58): 124.126,65.135 124.126,47.228 ccw(c126.285,47.228) 126.285,45.069 135.937,45.069 ccw(c135.937,47.228) 138.096,47.228 138.096,65.135 ccw(c135.525,65.262) 135.652,67.834 126.825,67.834 ccw(c126.825,65.135)
NetFT_OUT14_1 on Top Layer "NetJ_OUT_Relay_Channel4_1" (solid, pour order 57): 197.02,65.135 197.02,47.228 ccw(c199.179,47.228) 199.179,45.069 208.831,45.069 ccw(c208.831,47.228) 210.99,47.228 210.99,65.135 ccw(c208.418,65.262) 208.545,67.834 199.718,67.834 ccw(c199.718,65.135)
NetFT_IN14_1 on Top Layer "NetJ_OUT_Relay_Channel4_1" (solid, pour order 50): 179.881,65.151 179.881,47.244 ccw(c182.04,47.244) 182.04,45.085 191.692,45.085 ccw(c191.692,47.244) 193.851,47.244 193.851,65.151 ccw(c191.279,65.278) 191.406,67.85 182.579,67.85 ccw(c182.579,65.151)
NetFT_OUT13_1 on Top Layer "NetJ_OUT_Relay_Channel4_1" (solid, pour order 56): 160.573,65.135 160.573,47.228 ccw(c162.732,47.228) 162.732,45.069 172.384,45.069 ccw(c172.384,47.228) 174.543,47.228 174.543,65.135 ccw(c171.971,65.262) 172.098,67.834 163.272,67.834 ccw(c163.272,65.135)
NetFT_IN13_1 on Top Layer "NetJ_OUT_Relay_Channel4_1" (solid, pour order 49): 143.434,65.151 143.434,47.244 ccw(c145.593,47.244) 145.593,45.085 155.245,45.085 ccw(c155.245,47.244) 157.404,47.244 157.404,65.151 ccw(c154.832,65.278) 154.959,67.85 146.133,67.85 ccw(c146.133,65.151)
NetFT_IN12_1 on Top Layer "NetJ_OUT_Relay_Channel4_1" (solid, pour order 48): 106.987,65.151 106.987,47.244 ccw(c109.146,47.244) 109.146,45.085 118.798,45.085 ccw(c118.798,47.244) 120.957,47.244 120.957,65.151 ccw(c118.386,65.278) 118.513,67.85 109.686,67.85 ccw(c109.686,65.151)
NetFT_IN11_1 on Top Layer "NetJ_OUT_Relay_Channel4_1" (solid, pour order 47): 70.231,65.151 70.231,47.244 ccw(c72.39,47.244) 72.39,45.085 82.042,45.085 ccw(c82.042,47.244) 84.201,47.244 84.201,65.151 ccw(c81.629,65.278) 81.756,67.85 72.93,67.85 ccw(c72.93,65.151)
NetFT_OUT11_1 on Top Layer "NetJ_OUT_Relay_Channel4_1" (solid, pour order 55): 87.37,65.135 87.37,47.228 ccw(c89.529,47.228) 89.529,45.069 99.181,45.069 ccw(c99.181,47.228) 101.34,47.228 101.34,65.135 ccw(c98.768,65.262) 98.895,67.834 90.069,67.834 ccw(c90.069,65.135)

## Silkscreen, mask and mechanical layers (free items; w line width, h text height)
Top Overlay:
  text "SMART_PLUGS-ESP32_DEVKIT-4x20_v0.2.X" at 70.485,75.311 h1.52
Mechanical 1:
  lines w0.1: 0.127,0 229.108,0 ; 0.127,0 0.127,84.074 ; 0.127,0 229.108,0 ; 0.127,0 0.127,84.074 ; 0.127,84.074 229.108,84.201 ; 0.127,84.074 229.108,84.201 ; 229.108,0 229.108,0.127 ; 229.108,0 229.108,0.127 ; 229.108,0.127 229.108,84.201 ; 229.108,0.127 229.108,84.201
  lines w0.254: 0.127,84.074 0.127,0 229.108,0 ; 229.108,0.127 229.108,84.201
Top Assembly:
  lines w0.254: 0.127,84.074 229.108,84.201